# Altium PCB BT_Lamp_RC.PcbDoc
Units mm, origin at the board's own origin, x right, y up, seen from the top; angles counter-clockwise.
Board outline 34.8 x 84.46 mm, 2 copper layers (Top Layer, Bottom Layer), stack 1.671 mm thick; 41 components, 31 nets, 148 pads, 44 vias.
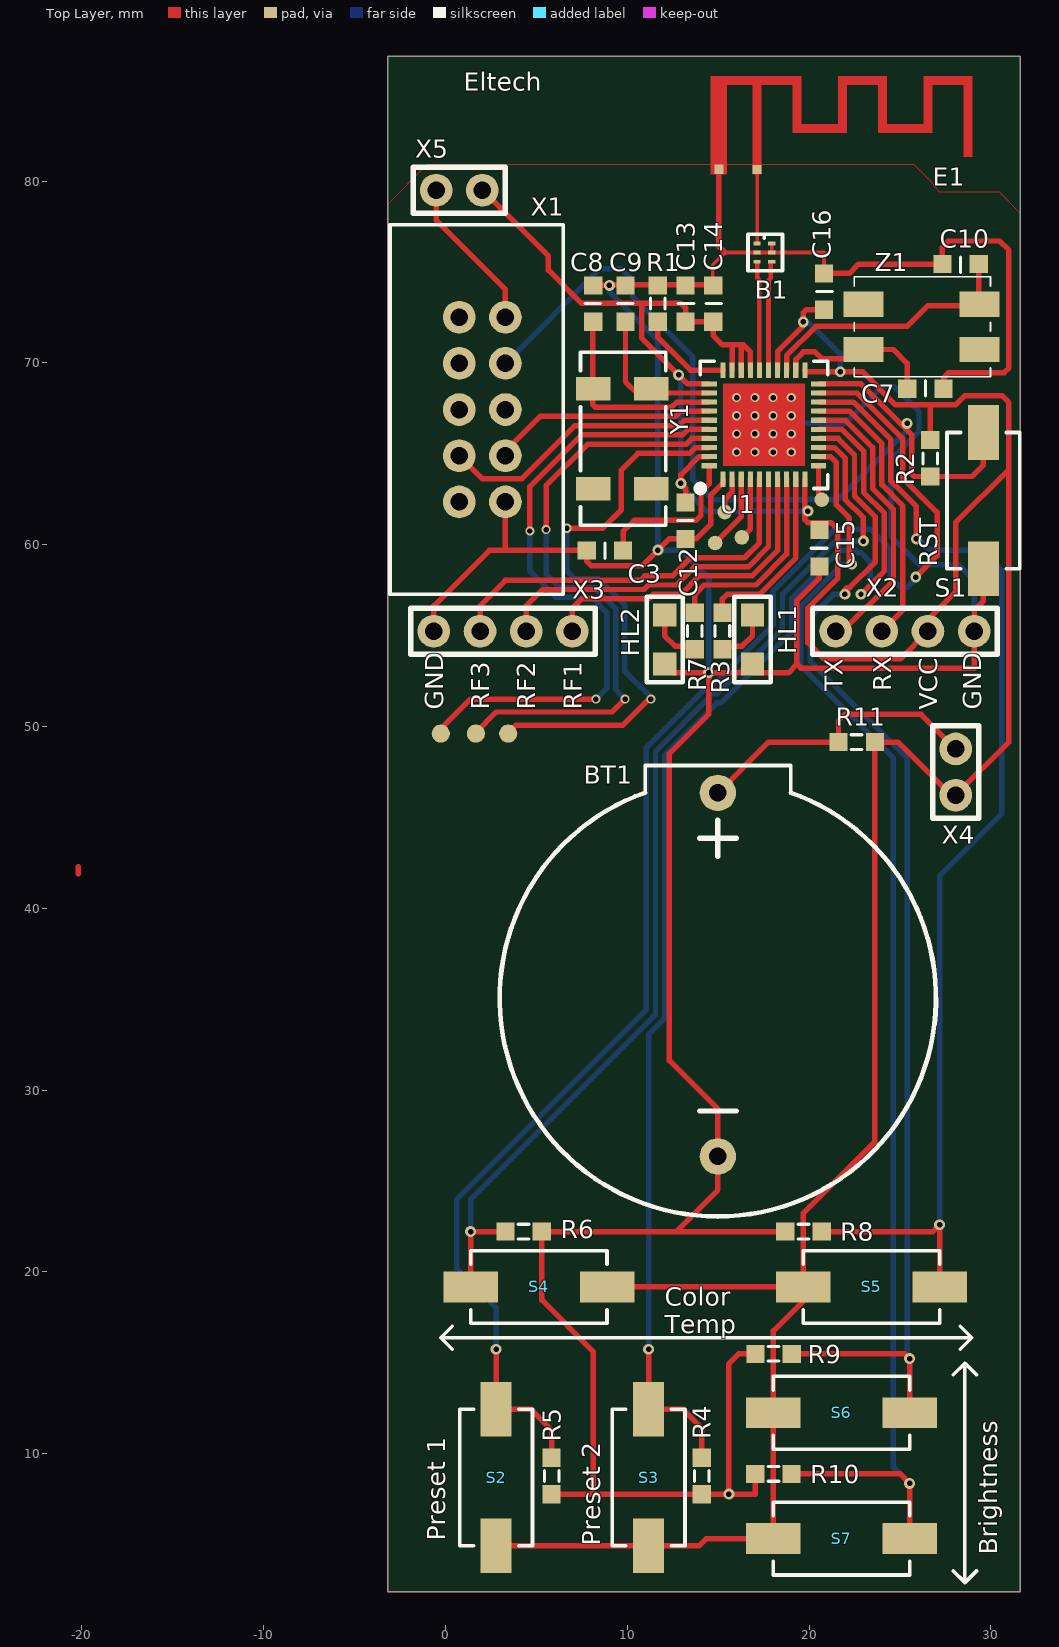
[diagram p0: Top Layer view]
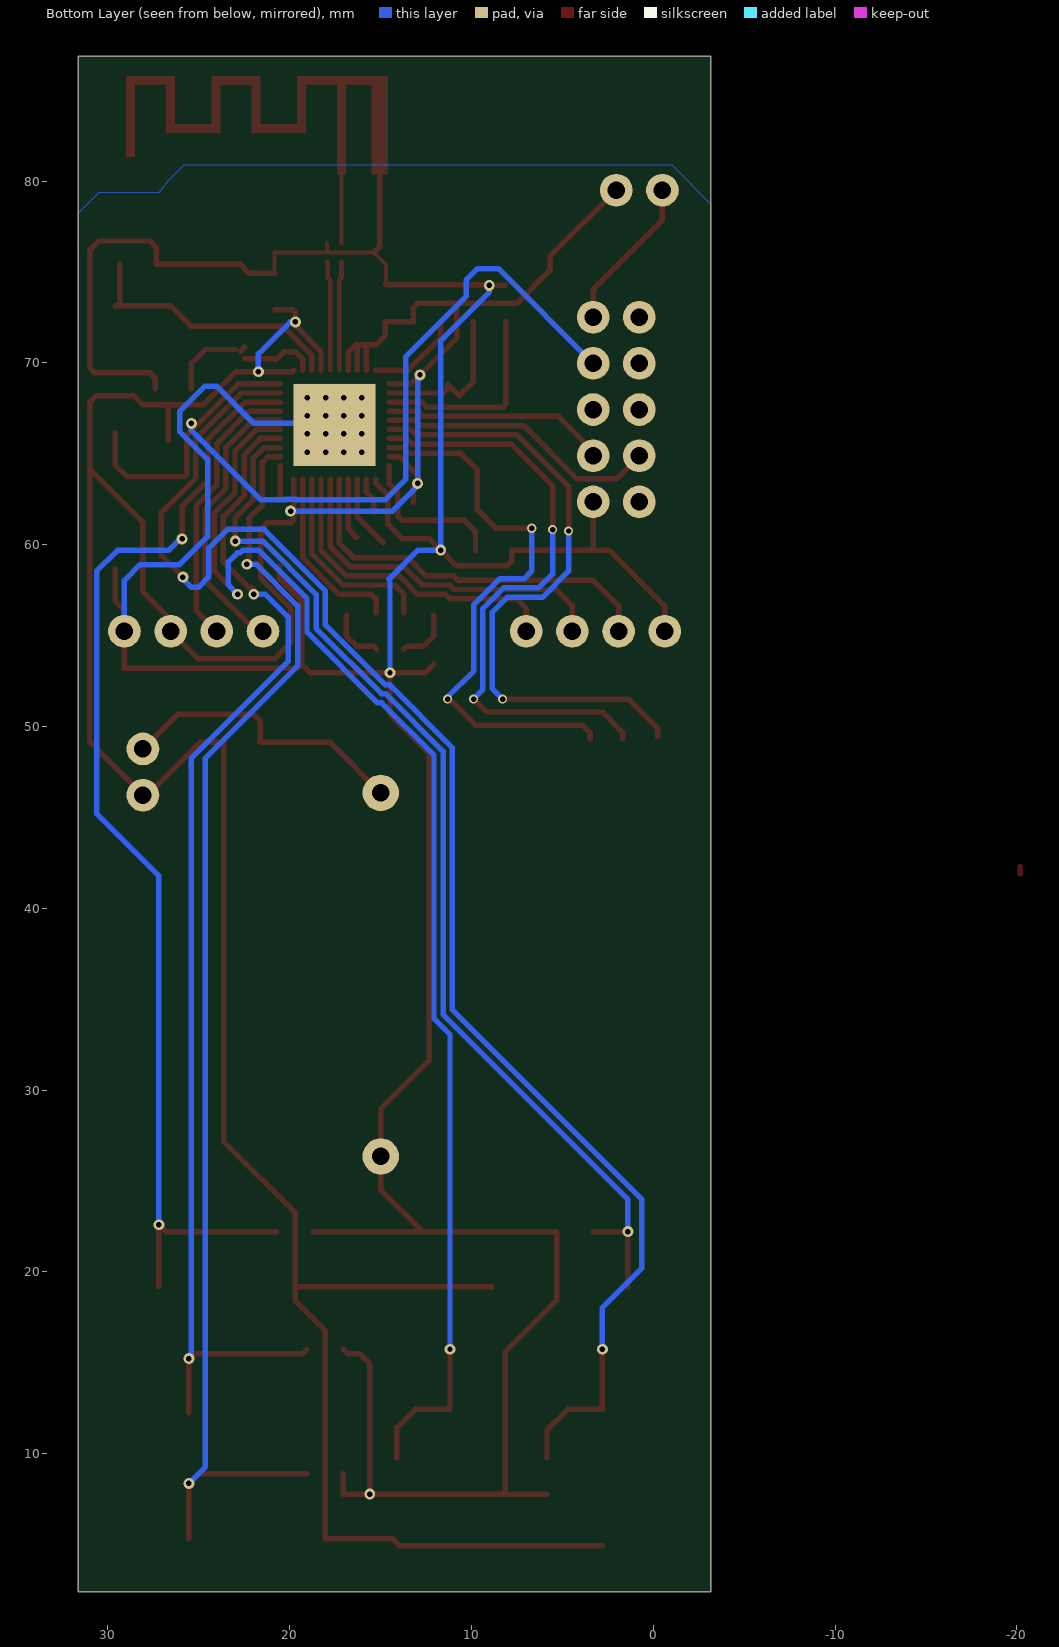
[diagram p1: Bottom Layer view, seen from below]
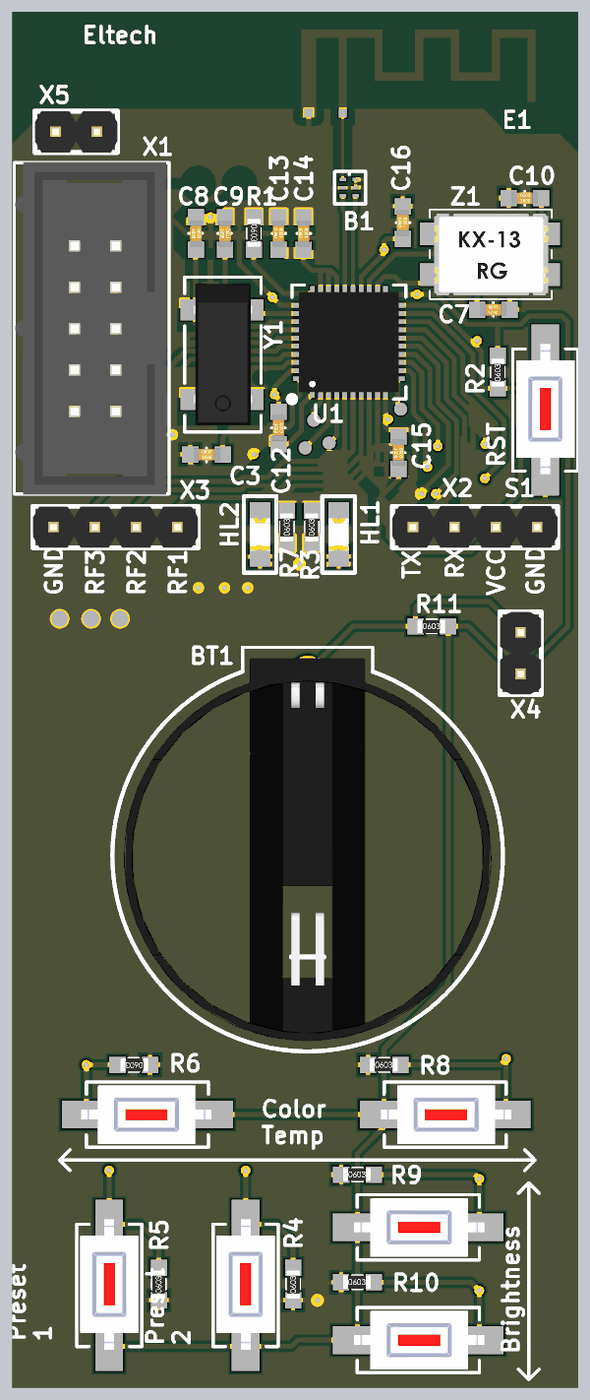
[diagram p2: 3D render of the assembled board from above, using the file's embedded part models]

## Layer stack, top to bottom
Top Solder: solder mask 0.0102, Solder Resist, Dk 3.5
Top Layer: signal copper 0.0356
Dielectric 1: dielectric 1.6, FR-4, Dk 4.8
Bottom Layer: signal copper 0.0356
Bottom Solder: solder mask 0.0102, Solder Resist, Dk 3.5

## Board outline
-3.175,2.413 -3.175,86.868 31.623,86.868 31.623,2.413

## Design rules (kind name [scope] priority, off if disabled: settings)
Clearance Poly-Ant [InPoly vs InNet('NetB1_1')] p1: gap=0.5
Clearance Clearance_1 [All] p2: gap=0.2
PolygonConnect "Poly to via" [All vs IsVia] p1: connectstyle=Direct reliefconductorwidth=0.254 reliefentries=4 polygonreliefangle="90 Angle" airgapwidth=0.254
PolygonConnect PolygonConnect_1 [All] p2: connectstyle=Relief reliefconductorwidth=0.254 reliefentries=4 polygonreliefangle="90 Angle" airgapwidth=0.254
RoutingVias [All] p1: holewidth=0.711 width=1.27 viastyle="Through Hole" minholewidth=0.711 minwidth=1.27 maxholewidth=0.711 maxwidth=1.27
ShortCircuit 1 [InNet('NetB1_1') And OnLayer('Top Layer') vs InNet('GND')] p1: allowed=TRUE
SolderMaskExpansion Ant [HasFootprint('2.4 INF Antenna')] p1: expansion=-100
SolderMaskExpansion SolderMaskExpansion_1 [All] p2: expansion=0.102
Width [All] p1: maxlimit=5 minlimit=0.15 preferedwidth=0.254
29 further rules are at their usual default settings.

## Components (designator, comment, footprint, x,y, rotation, side; value= is the part's Value field where it differs from the comment)
B1 "Balun" "2.4 Balun 50Ohm LFB182G45BG2D280" 17.145,76.573 r90 top
BT1 "CR2032" BH-642(CR2032) 14.986,26.355 r0 top
C3 "1uF" C0603 7.874,59.69 r0 top
C7 "22pF" C0603 27.3,68.58 r180 top
C8 "10pF" C0603 8.128,74.168 r270 top
C9 "10pF" C0603 9.906,74.163 r270 top
C10 "22pF" C0603 27.437,75.438 r0 top
C12 "100nF" C0603 13.208,62.225 r270 top
C13 "100nF" C0603 13.208,72.363 r90 top
C14 "100nF" C0603 14.732,72.363 r90 top
C15 "100nF" C0603 20.574,60.706 r270 top
C16 "100nF" C0603 20.828,73.025 r90 top
E1 "Antenna" "2.4 INF Antenna" 14.595,80.375 r0 top
HL1 "LED" LED_0805 16.891,56.134 r270 top
HL2 "LED" LED_0805 12.065,56.134 r270 top
R1 "56k" R0603 11.684,74.163 r270 top
R2 "10k" R0603 26.67,63.854 r90 top
R3 "150" R0603 15.24,54.356 r90 top
R4 "10k" R0603 14.097,7.879 r90 top
R5 "10k" R0603 5.842,7.879 r90 top
R6 "10k" R0603 5.202,22.225 r180 top
R7 "150" R0603 13.716,54.356 r90 top
R8 "10k" R0603 18.796,22.225 r0 top
R9 "10k" R0603 17.15,15.494 r0 top
R10 "10k" R0603 17.145,8.89 r0 top
R11 "10" R0603 21.722,49.149 r0 top
S1 "Tact_switch" Tact_switch_smd 29.591,58.674 r90 top
S2 "Tact_switch" Tact_switch_smd 2.794,4.946 r90 top
S3 "Tact_switch" Tact_switch_smd 11.176,4.946 r90 top
S4 "Tact_switch" Tact_switch_smd 8.89,19.177 r180 top
S5 "Tact_switch" Tact_switch_smd 19.685,19.177 r0 top
S6 "Tact_switch" Tact_switch_smd 18.034,12.255 r0 top
S7 "Tact_switch" Tact_switch_smd 18.034,5.334 r0 top
U1 "CC2541" "QFN40 6x6 0.5pitch" 15.272,63.596 r90 top
X1 "IDC-10" IDC-10 3.302,62.357 r0 top
X2 "USART" "Pins 4x2.54" 21.463,55.245 r0 top
X3 "RF_DB" "Pins 4x2.54" 6.985,55.245 r180 top
X4 "Current mesurement" "Pins 2x2.54" 28.067,48.768 r270 top
X5 "Jumper" "Pins 2x2.54" -0.508,79.502 r0 top
Y1 "32.756kHz" "Geyer KX - 327S 32.768kHz" 8.128,68.58 r270 top
Z1 "32MHz" "kx 13 12MHz" 22.987,73.239 r0 top

## Footprints (in the part's own frame and the unit in brackets; to place one, negate y for a bottom-side part, rotate by r counter-clockwise, add the part's x,y. Pads: shape width x height; smd on the part's side, far side on the other; paste and mask are expansions set on the pad)
"2.4 Balun 50Ohm LFB182G45BG2D280" [mm]
  rect 0.2x0.4 smd: 1(0,0) 2(-0.5,0) 3(-1,0) 4(-1,-0.8) 5(-0.5,-0.8) 6(0,-0.8)
  silkscreen extent -1.5,-1.4 0.5,0.5, body extent -1.3,-0.8 0.3,0, height 1
"2.4 INF Antenna" [mm]
  rect 0.5x0.5 smd: 1(2.55,0.27) 2(0.45,0.28)
  Top Layer region: 2.3,0 2.8,0 2.8,4.9 2.3,4.9
  Top Layer region: 13.9,0.96 14.4,0.96 14.4,4.9 13.9,4.9
  Top Layer region: 11.7,4.9 14.4,4.9 14.4,5.4 11.7,5.4
  Top Layer region: 11.7,2.26 12.2,2.26 12.2,4.9 11.7,4.9
  Top Layer region: 9.7,2.26 11.7,2.26 11.7,2.76 9.7,2.76
  Top Layer region: 9.2,2.26 9.7,2.26 9.7,4.9 9.2,4.9
  Top Layer region: 7,4.9 9.7,4.9 9.7,5.4 7,5.4
  Top Layer region: 7,2.26 7.5,2.26 7.5,4.9 7,4.9
  Top Layer region: 5,2.26 7,2.26 7,2.76 5,2.76
  Top Layer region: 4.5,2.26 5,2.26 5,4.9 4.5,4.9
  Top Layer region: 0,4.9 5,4.9 5,5.4 0,5.4
  Top Layer region: 0,0 0.9,0 0.9,4.9 0,4.9
BH-642(CR2032) [mm]
  round 2 hole 0.96: 1(0,0) 2(0,20)
  silkscreen extent -12,-3.3 12,21.5, body extent -11.3,-2.67 11.3,20.83, height 8.2
C0603 [mm]
  rect 1x1 smd: 1(-0.1,0) 2(1.9,0)
  silkscreen extent 0.9,-0.45 0.9,0.4, body extent 0.1,-0.4 1.7,0.4, height 0.8
"Geyer KX - 327S 32.768kHz" [mm]
  rect 1.3x1.9 smd: 1(0,0) 2(0,3.2) 3(5.5,3.2) 4(5.5,0)
  silkscreen extent -2,-0.7 7.5,4, body extent -1.6,-0.25 7.1,3.55, height 2.51
IDC-10 [mm]
  round 1.8 hole 0.96: 1(0,0) 2(-2.54,0) 3(0,2.54) 4(-2.54,2.54) 5(0,5.08) 6(-2.54,5.08) 7(0,7.62) 8(-2.54,7.62) 9(0,10.16) 10(-2.54,10.16)
  silkscreen extent -6.35,-5.08 3.17,15.24, body extent -6.3,-5.12 3.05,15.28, height 9.25
"kx 13 12MHz" [mm]
  rect 2.2x1.4 smd: 1(0,-2.5) 2(6.4,-2.5) 3(6.4,0) 4(0,0)
  silkscreen extent -0.5,-4 7,1.5, body extent -0.22,-3.77 6.78,1.23, height 1.3
LED_0805 [mm]
  rect 1.27x1.27 smd: 1(0,0) 2(2.7,0)
  silkscreen extent -1,-1 3.7,1, body extent 0.35,-0.62 2.35,0.63, height 0.81
"Pins 2x2.54" [mm]
  round 1.8 hole 0.96: 1(0,0) 2(2.54,0)
  silkscreen extent -1.27,-1.27 3.81,1.27, body extent -1.27,-1.27 3.81,1.27, height 8.81
"Pins 4x2.54" [mm]
  round 1.8 hole 0.96: 1(0,0) 2(2.54,0) 3(5.08,0) 4(7.62,0)
  silkscreen extent -1.27,-1.27 8.89,1.27, body extent -1.27,-1.27 8.89,1.27, height 8.81
"QFN40 6x6 0.5pitch" [mm]
  rect 0.85x0.28 smd: 1(0,0) 2(0,-0.5) 3(0,-1) 4(0,-1.5) 5(0,-2) 6(0,-2.5) 7(0,-3) 8(0,-3.5) 9(0,-4) 10(0,-4.5) 21(6,-4.5) 22(6,-4) 23(6,-3.5) 24(6,-3) 25(6,-2.5) 26(6,-2) 27(6,-1.5) 28(6,-1) 29(6,-0.5) 30(6,0)
  rect 0.28x0.85 smd: 11(0.75,-5.25) 12(1.25,-5.25) 13(1.75,-5.25) 14(2.25,-5.25) 15(2.75,-5.25) 16(3.25,-5.25) 17(3.75,-5.25) 18(4.25,-5.25) 19(4.75,-5.25) 20(5.25,-5.25) 31(5.25,0.75) 32(4.75,0.75) 33(4.25,0.75) 34(3.75,0.75) 35(3.25,0.75) 36(2.75,0.75) 37(2.25,0.75) 38(1.75,0.75) 39(1.25,0.75) 40(0.75,0.75)
  rect 4.5x4.5 smd far side: 41(2.997,-2.261)
  Top Layer region: 5.25,0 5.25,-4.5 0.75,-4.5 0.75,-0.75 0.75,0 1.5,0
  silkscreen extent -0.75,-5.75 6.5,1.5, body extent -0.07,-5.32 6.08,0.83, height 1.03
R0603 [mm]
  rect 1x1 smd: 1(-0.1,0) 2(1.9,0)
  silkscreen extent 0.6,-0.4 1.2,0.4, body extent 0.01,-0.4 1.71,0.4, height 0.56
Tact_switch_smd [mm]
  rect 3x1.7 smd: 1(0,0) 2(7.5,0)
  silkscreen extent 0,-2 7.5,2, body extent -0.19,-1.8 7.81,1.8, height 2.51

## Part data
B1: library part "2.4 Balun 50Ohm LFB182G45BG2D280"
BT1: library part CR2032_Holder_BH-642
C3 C7 C8 C9 C10 C12 C13 C14 C15 C16: library part Condensator
R1 R2 R3 R4 R5 R6 R7 R8 R9 R10 R11: library part Resistor
X2 X3: library part "Pins 4x2.54"
X4 X5: library part "Pins 2x2.54"
Y1: library part "Crystal Oscillator"
Z1: library part "KX 13 Geyer"

## Free pads (board coordinates)
  round 0.8 smd: 2(15.367,61.798) 4(14.834,60.096) 5(16.307,60.401) 6(20.701,62.484)
  round 1 smd: 7(-0.254,49.612) 8(1.676,49.612) 9(3.454,49.612)

## Via types
v1: diameter 0.5, hole 0.3, Top Layer to Bottom Layer, 22 vias
v2: diameter 0.6, hole 0.3, Top Layer to Bottom Layer, 22 vias

## Nets (pads, with @x,y where several pads share a name; then routed paths per layer and width w, separated by ;. In a path a pad name is that pad's centre, name@x,y a point inside that pad or via, vN(x,y) a via of type N, cw(c..) or ccw(c..) an arc to the next point about the centre after c; other vN are vias at no path point)
BUTTON1: R5.2 S2.2 U1.19 | length 84.6
  Top Layer w0.3: v2(2.794,15.748) S2.2 4.699,12.446 5.842,11.303 R5.2 ; U1.19 22.641,68.346 25.154,65.833 25.154,63.674 27.051,61.777 27.051,59.405 v2(25.871,58.225)
  Bottom Layer w0.3: v2(2.794,15.748) 2.794,18.034 0.635,20.193 0.635,24.003 11.057,34.425 11.057,48.848 14.518,52.309 14.747,52.309 18.042,55.604 18.042,57.484 21.406,60.848 23.408,60.848 24.456,59.8 24.456,58.221 25.019,57.658 25.4,57.658 25.871,58.129 v2(25.871,58.225)
BUTTON2: R8.2 S5.2 U1.18 | length 63.7
  Top Layer w0.3: U1.18 22.434,67.846 24.503,65.777 24.503,63.508 25.908,62.103 v2(25.908,60.325) ; R8.2 26.811,22.225 v2(27.185,22.599) S5.2
  Bottom Layer w0.3: v2(25.908,60.325) 26.035,60.325 26.67,59.69 29.464,59.69 30.607,58.547 30.607,45.205 27.185,41.783 v2(27.185,22.599)
BUTTON3: R4.2 S3.2 U1.15 | length 72.5
  Top Layer w0.3: v2(11.176,15.748) S3.2 13.081,12.446 14.097,11.43 R4.2 ; U1.15 21.812,66.346 23.003,65.155 23.003,62.887 24.146,61.744 24.146,58.563 v2(22.86,57.277)
  Bottom Layer w0.3: v2(11.176,15.748) 11.176,33.075 12.057,33.956 12.057,48.434 14.932,51.309 15.161,51.309 19.042,55.19 19.042,57.045 21.687,59.69 22.576,59.69 22.718,59.548 22.875,59.548 23.368,59.055 23.368,57.785 v2(22.86,57.277)
BUTTON4: R9.2 S6.2 U1.14 | length 66.4
  Top Layer w0.3: R9.2@19.045,15.748 19.299,15.494 25.273,15.494 v2(25.534,15.233) S6.2 ; U1.14 21.605,65.846 22.503,64.948 22.503,62.68 23.646,61.537 23.646,59.049 22.24,57.643 22.083,57.643 21.971,57.531 v2(21.971,57.277)
  Bottom Layer w0.3: v2(21.971,57.277) 21.336,57.277 20.066,56.007 20.066,53.594 25.4,48.26 25.4,15.367 v2(25.534,15.233)
BUTTON5: R6.2 S4.2 U1.13 | length 59.3
  Top Layer w0.3: S4.2 v2(1.39,22.225) ; v2@1.637,22.225 R6.2 ; U1.13 21.398,65.346 22.003,64.741 22.003,62.472 22.987,61.488 v2(22.987,60.198)
  Bottom Layer w0.3: v2(1.39,22.225) 1.39,23.996 11.557,34.163 11.557,48.641 14.725,51.809 14.954,51.809 18.542,55.397 18.542,57.277 21.463,60.198 v2(22.987,60.198)
BUTTON6: R10.2 S7.2 U1.12 | length 71.1
  Top Layer w0.3: R10.2 25.019,8.89 v2(25.534,8.375) S7.2 ; U1.12 21.191,64.846 21.503,64.534 21.503,62.19 22.225,61.468 v2@22.225,59.055
  Bottom Layer w0.3: v2(22.352,58.928) 21.844,58.928 19.558,56.642 19.558,53.34 24.638,48.26 24.638,9.271 v2(25.534,8.375)
DEBUG_DC: U1.34 X1.3 | length 12.4
  Top Layer w0.3: X1.3 3.302,65.151 5.207,67.056 12.645,67.056 12.935,67.346 U1.34
DEBUG_DD: U1.35 X1.4 | length 15.6
  Top Layer w0.3: X1.4 2.032,63.627 4.191,63.627 7.12,66.556 12.852,66.556 13.142,66.846 U1.35
GND: B1.2 B1.5 B1.6 BT1.1 C3.1 C7.1 C8.1 C9.1 C10.1 C12.2 C13.2 C14.2 C15.2 C16.2 E1.2 HL1.2 HL2.2 R1.1 R4.1 R5.1 R6.1 R8.1 R9.1 R10.1 S1.1 U1.1 U1.41 X1.1 X2.4 X3.4 | length 230.5
  Top Layer w0.2: C14.2@14.7,74.295 14.7,75.406 15.367,76.073 B1.2 B1.5 ; B1.6 B1.5 ; C16.2 20.828,76.073 B1.5
  Top Layer w0.3: X3.4@-0.254,55.245 -0.635,55.626 -0.635,56.642 2.413,59.69 3.302,59.69 ; X1.1 3.302,59.69 ; R5.1 8.128,7.779 ; C8.1 v2(9.017,74.268) 9.017,74.295 C9.1@9.906,74.295 ; C9.1 C9.1@9.906,74.295 ; HL2.2 12.54,52.959 v2(14.478,52.959) ; C14.2@14.7,74.295 C9.1@9.906,74.295 ; E1.2 15.045,76.395 15.367,76.073 ; U1.1 15.272,63.405 14.597,62.73 14.597,61.134 13.788,60.325 C12.2 12.302,60.325 v2(11.684,59.707) 10.817,58.84 8.038,58.84 7.774,59.104 C3.1 3.302,59.69 ; R10.1 17.045,7.779 v2(15.589,7.779) ; R9.1@17.045,15.748 16.791,15.494 16.129,15.494 15.589,14.954 v2(15.589,7.779) ; R8.1 12.7,22.225 ; C15.2 20.574,58.166 19.337,56.929 19.337,53.434 ; C16.2 22.22,74.925 22.733,75.438 C10.1 27.337,76.359 27.686,76.708 30.48,76.708 30.988,76.2 30.988,69.723 30.734,69.469 27.686,69.469 27.4,69.183 C7.1 ; X2.4 29.083,53.213 19.558,53.213 19.337,53.434 ; X2.4@29.083,55.729 29.083,56.388 29.591,56.896 S1.1 ; 8.128,7.779 v2(15.589,7.779) ; 8.128,7.779 8.128,15.621 5.302,18.447 R6.1 12.7,22.225 ; 12.7,22.225 14.986,24.511 BT1.1 14.986,28.956 12.319,31.623 12.319,48.514 14.478,50.673 v2(14.478,52.959) ; v2(14.478,52.959) 18.862,52.959 19.337,53.434
  Bottom Layer w0.3: v2(9.017,74.268) 9.017,73.914 11.684,71.247 v2(11.684,59.707) 12.937,59.707 14.541,58.102 14.478,58.039 v2(14.478,52.959) ; v1(18.022,67.096) v1(19.022,67.096) 19.443,66.675 21.971,66.675 24.003,68.707 24.668,68.707 26.05,67.325 26.05,66.237 24.511,64.698 24.511,60.452 26.056,58.907 28.215,58.907 29.083,58.039 X2.4
  other v1: 16.022,65.096 17.022,65.096 18.022,65.096 19.022,65.096 16.022,66.096 17.022,66.096 18.022,66.096 19.022,66.096 16.022,67.096 17.022,67.096 16.022,68.096 17.022,68.096 18.022,68.096 19.022,68.096
NetB1_1: B1.1 E1.1 | length 4.1
  Top Layer w0.2: B1.1 E1.1
NetBT1_2: BT1.2 R11.1 X4.1 | length 16.3
  Top Layer w0.3: BT1.2 17.78,49.149 R11.1 21.622,50.324 21.971,50.673 26.162,50.673 X4.1
NetC3_2: C3.2 U1.40 | length 8.6
  Top Layer w0.3: C3.2 9.774,60.726 10.389,61.341 13.792,61.341 14.058,61.607 14.058,62.898 14.522,63.362 U1.40
NetC7_2: C7.2 U1.22 Z1.1 | length 8.6
  Top Layer w0.3: U1.22 19.272,70.199 19.685,70.612 20.32,70.612 20.701,70.231 Z1.1@22.469,70.231 ; Z1.1@22.469,70.866 Z1.1@22.683,70.652 ; Z1.1 24.638,70.739 25.4,69.977 C7.2
NetC8_2: C8.2 U1.33 Y1.1 | length 11.2
  Top Layer w0.3: C8.2@8.103,72.268 8.103,67.716 8.255,67.564 12.446,67.564 12.728,67.846 U1.33
NetC9_2: C9.2 U1.32 Y1.2 | length 8.8
  Top Layer w0.3: C9.2 9.906,68.961 10.668,68.199 11.303,68.834 11.303,68.58 11.537,68.346 U1.32
NetC10_2: C10.2 U1.23 Z1.3 | length 14.9
  Top Layer w0.3: U1.23 18.772,70.406 20.375,72.009 25.4,72.009 26.543,73.152 Z1.3@29.591,73.152 ; Z1.3@29.337,73.289 C10.2
NetHL1_1: HL1.1 R3.1 | length 3.1
  Top Layer w0.3: R3.1 15.403,54.419 16.319,54.419 16.891,54.991 HL1.1
NetHL2_1: HL2.1 R7.1 | length 3.1
  Top Layer w0.3: HL2.1 12.065,54.991 12.637,54.419 13.553,54.419 R7.1
NetR1_2: R1.2 U1.30 | length 5.2
  Top Layer w0.3: R1.2 11.684,71.404 13.477,69.611 13.477,69.596 U1.30
NetX1_9: X1.9 X5.1 | length 8.6
  Top Layer w0.3: X5.1 -0.508,77.851 3.302,74.041 X1.9
PWM1: R3.2 U1.9 | length 10.1
  Top Layer w0.3: R3.2 15.24,57.023 15.494,57.277 17.272,57.277 19.272,59.277 U1.9
PWM2: R7.2 U1.8 | length 11.1
  Top Layer w0.3: R7.2 13.716,57.277 14.224,57.785 17.073,57.785 18.772,59.484 U1.8
RESET_N: R2.1 S1.2 U1.20 X1.7 | length 50.4
  Top Layer w0.3: U1.20 22.848,68.846 25.654,66.04 25.654,63.881 25.781,63.754 R2.1 28.956,63.754 29.591,64.389 S1.2
  Bottom Layer w0.3: X1.7 8.509,75.184 9.652,75.184 10.287,74.549 10.287,73.66 13.604,70.343 13.604,63.612 14.732,62.484 19.655,62.484 19.67,62.499 20.208,62.499 20.223,62.484 21.59,62.484 25.4,66.294 v2(25.4,66.675)
RF_DEBUG1: U1.7 X3.1 | length 17.8
  Top Layer w0.3: X3.1 6.985,56.515 7.509,57.039 11.192,57.039 11.43,57.277 12.954,57.277 13.962,58.285 16.866,58.285 18.272,59.691 U1.7
RF_DEBUG2: U1.6 X3.2 | length 19.8
  Top Layer w0.3: X3.2 4.445,56.642 5.342,57.539 10.93,57.539 11.176,57.785 12.7,57.785 13.7,58.785 16.659,58.785 17.772,59.898 U1.6
RF_DEBUG3: U1.5 X3.3 | length 21.7
  Top Layer w0.3: X3.3 1.905,56.642 3.302,58.039 10.723,58.039 10.969,58.285 12.493,58.285 13.493,59.285 16.452,59.285 17.272,60.105 U1.5
RF_N: B1.3 U1.26 | length 6
  Top Layer w0.25: B1.3 17.145,74.676 17.272,74.549 U1.26
RF_P: B1.4 U1.25 | length 6
  Top Layer w0.25: U1.25 17.772,74.541 17.907,74.676 17.907,75.535 B1.4
USART_RX: U1.17 X2.2 | length 15.5
  Top Layer w0.3: U1.17 22.227,67.346 24.003,65.57 24.003,63.301 25.146,62.158 25.146,56.388 X2.2
USART_TX: U1.16 X2.1 | length 15.7
  Top Layer w0.3: U1.16 22.02,66.846 23.503,65.363 23.503,63.094 24.646,61.951 24.646,58.047 21.844,55.245 X2.1
VCC: C12.1 C13.1 C14.1 C15.1 C16.1 R2.2 R11.2 S2.1 S3.1 S4.1 S5.1 S6.1 S7.1 U1.10 U1.21 U1.24 U1.27 U1.28 U1.29 U1.31 U1.39 X2.3 X4.2 X5.2 | length 200.3
  Top Layer w0.3: X5.2 5.664,75.87 5.664,75.108 7.493,73.279 10.795,73.279 ; S2.1 S3.1 13.963,4.946 14.351,5.334 S7.1 S6.1 18.034,16.764 19.685,18.415 S5.1 ; S4.1 S5.1 ; v2(12.827,69.342) 10.795,71.374 10.795,73.279 ; v2@13.026,69.143 13.323,68.846 U1.31 ; C12.1 13.208,63.119 v2(12.954,63.373) 12.954,63.838 13.962,64.846 U1.39 ; U1.29 15.772,70.969 ; U1.28 16.272,70.882 ; U1.27 16.772,70.604 16.383,70.993 15.24,70.993 14.732,71.501 C14.1 C13.1 13.208,73.025 12.954,73.279 10.795,73.279 ; U1.24 18.272,70.636 19.685,72.049 v2(19.685,72.263) 19.685,72.771 19.839,72.925 C16.1 ; U1.10 19.772,61.381 19.939,61.214 21.209,61.214 21.59,60.833 21.59,58.166 19.939,56.515 19.939,54.61 20.828,53.721 25.019,53.721 X2.3 26.543,55.88 28.067,57.404 28.067,61.214 30.988,64.135 ; U1.21 19.851,69.517 v2(21.717,69.517) 22.939,69.517 24.765,67.691 26.67,67.691 ; R2.2 26.67,67.691 ; X4.2@27.813,46.228 24.892,49.149 R11.2 23.622,27.178 19.685,23.241 S5.1 ; X4.2 30.988,49.149 30.988,64.135 ; 26.67,67.691 28.067,67.691 28.575,68.199 30.607,68.199 30.988,67.818 30.988,64.135
  Bottom Layer w0.3: v2@12.954,69.342 v2(12.954,63.373) 12.827,63.373 14.351,61.849 v2(19.939,61.849) ; v2(19.685,72.263) 19.953,72.263 21.717,70.499 v2(21.717,69.517)
pads on no net: U1.2 U1.3 U1.4 U1.11 U1.36 U1.37 U1.38 X1.2 X1.5 X1.6 X1.8 X1.10 Y1.3 Y1.4 Z1.2 Z1.4
copper on no net: | length 113.4
  Top Layer w0.3: -20.193,41.91 -20.193,42.291 ; -0.254,49.479 -0.254,49.886 1.372,51.511 v1(8.28,51.511) ; 1.676,49.352 1.676,49.682 2.794,50.8 9.169,50.8 v1(9.881,51.511) ; 3.454,49.301 3.454,49.657 3.861,50.063 9.754,50.063 v1@11.303,51.613 ; v1(4.648,60.757) 4.648,63.195 7.493,66.04 12.446,66.04 13.043,66.04 13.349,66.346 14.522,66.346 ; v1(5.537,60.833) 5.537,63.246 7.831,65.54 12.827,65.54 13.25,65.54 13.556,65.846 14.522,65.846 ; v1(6.68,60.909) 8.661,60.909 9.677,61.925 9.677,64.11 10.592,65.024 12.7,65.024 13.433,65.024 13.755,65.346 13.792,65.346 14.522,65.346 ; 14.834,60.096 15.418,60.681 16.272,61.535 16.272,62.119 16.272,63.596 ; 15.367,61.798 15.367,62.484 15.772,62.889 15.772,63.596 ; 16.307,60.401 16.772,60.866 16.772,61.984 16.772,63.596 ; 20.522,64.346 20.522,62.663 20.701,62.484
  Bottom Layer w0.3: v1(4.648,60.757) 4.648,58.547 6.071,57.125 8.026,57.125 8.865,56.286 8.865,52.095 v1(8.28,51.511) ; v1(5.537,60.833) 5.537,58.387 6.299,57.625 8.234,57.625 9.365,56.494 9.365,52.027 v1(9.881,51.511) ; v1(6.68,60.909) 6.68,58.556 7.112,58.125 8.441,58.125 9.865,56.701 9.865,53.051 v1@11.303,51.613
  other v1: 11.303,51.511

## Polygon pours and split planes (outlines as drawn)
GND on Top Layer "Top Layer-No Net" (solid, shelved, pour order 0): -3.175,2.413 31.623,2.413 31.623,78.232 30.48,79.375 27.178,79.375 26.67,80.01 25.781,80.899 -1.016,80.899 -3.175,78.74
GND on Bottom Layer "Top Layer-No Net" (solid, shelved, pour order 4): -3.175,2.413 31.623,2.413 31.623,78.232 30.48,79.375 27.178,79.375 26.67,80.01 25.781,80.899 -1.016,80.899 -3.175,78.74

## Silkscreen, mask and mechanical layers (free items; w line width, h text height)
Top Overlay:
  lines w0.2: 0.381,15.748 -0.254,16.383 ; 0.381,17.018 -0.254,16.383 ; 27.94,3.556 28.575,2.921 ; 27.94,14.351 28.575,14.986 ; 28.321,15.748 28.956,16.383 ; 28.321,17.018 28.956,16.383 ; 29.21,3.556 28.575,2.921 ; 29.21,14.351 28.575,14.986 ; -0.254,16.383 27.686,16.383 28.956,16.383 ; 28.575,2.921 28.575,14.986
  text "Eltech" at 1.016,84.963 h1
  text "RST" at 27.051,58.801 h1 r90
  text "TX" at 21.844,51.943 h1 r90
  text "RX" at 24.511,51.943 h1 r90
  text "GND" at -0.127,50.927 h1 r90
  text "RF3" at 2.413,50.927 h1 r90
  text "RF2" at 4.953,50.927 h1 r90
  text "RF1" at 7.493,50.927 h1 r90
  text "VCC" at 27.051,50.927 h1 r90
  text "GND" at 29.464,50.927 h1 r90
  text "Color / Temp" at 12.065,16.637 h1
  text "Preset 1" at 0,5.207 h1 r90
  text "Preset 2" at 8.509,4.953 h1 r90
  text "Brightness" at 30.353,4.445 h1 r90